# Altium PCB PCB_COF_1.2.PcbDoc
Units mm, origin at the board's own origin, x right, y up, seen from the top; angles counter-clockwise.
Board outline 70.1 x 92.58 mm, 2 copper layers (Top Layer, Bottom Layer), stack 0.325 mm thick; 59 components, 26 nets, 178 pads, 381 vias.
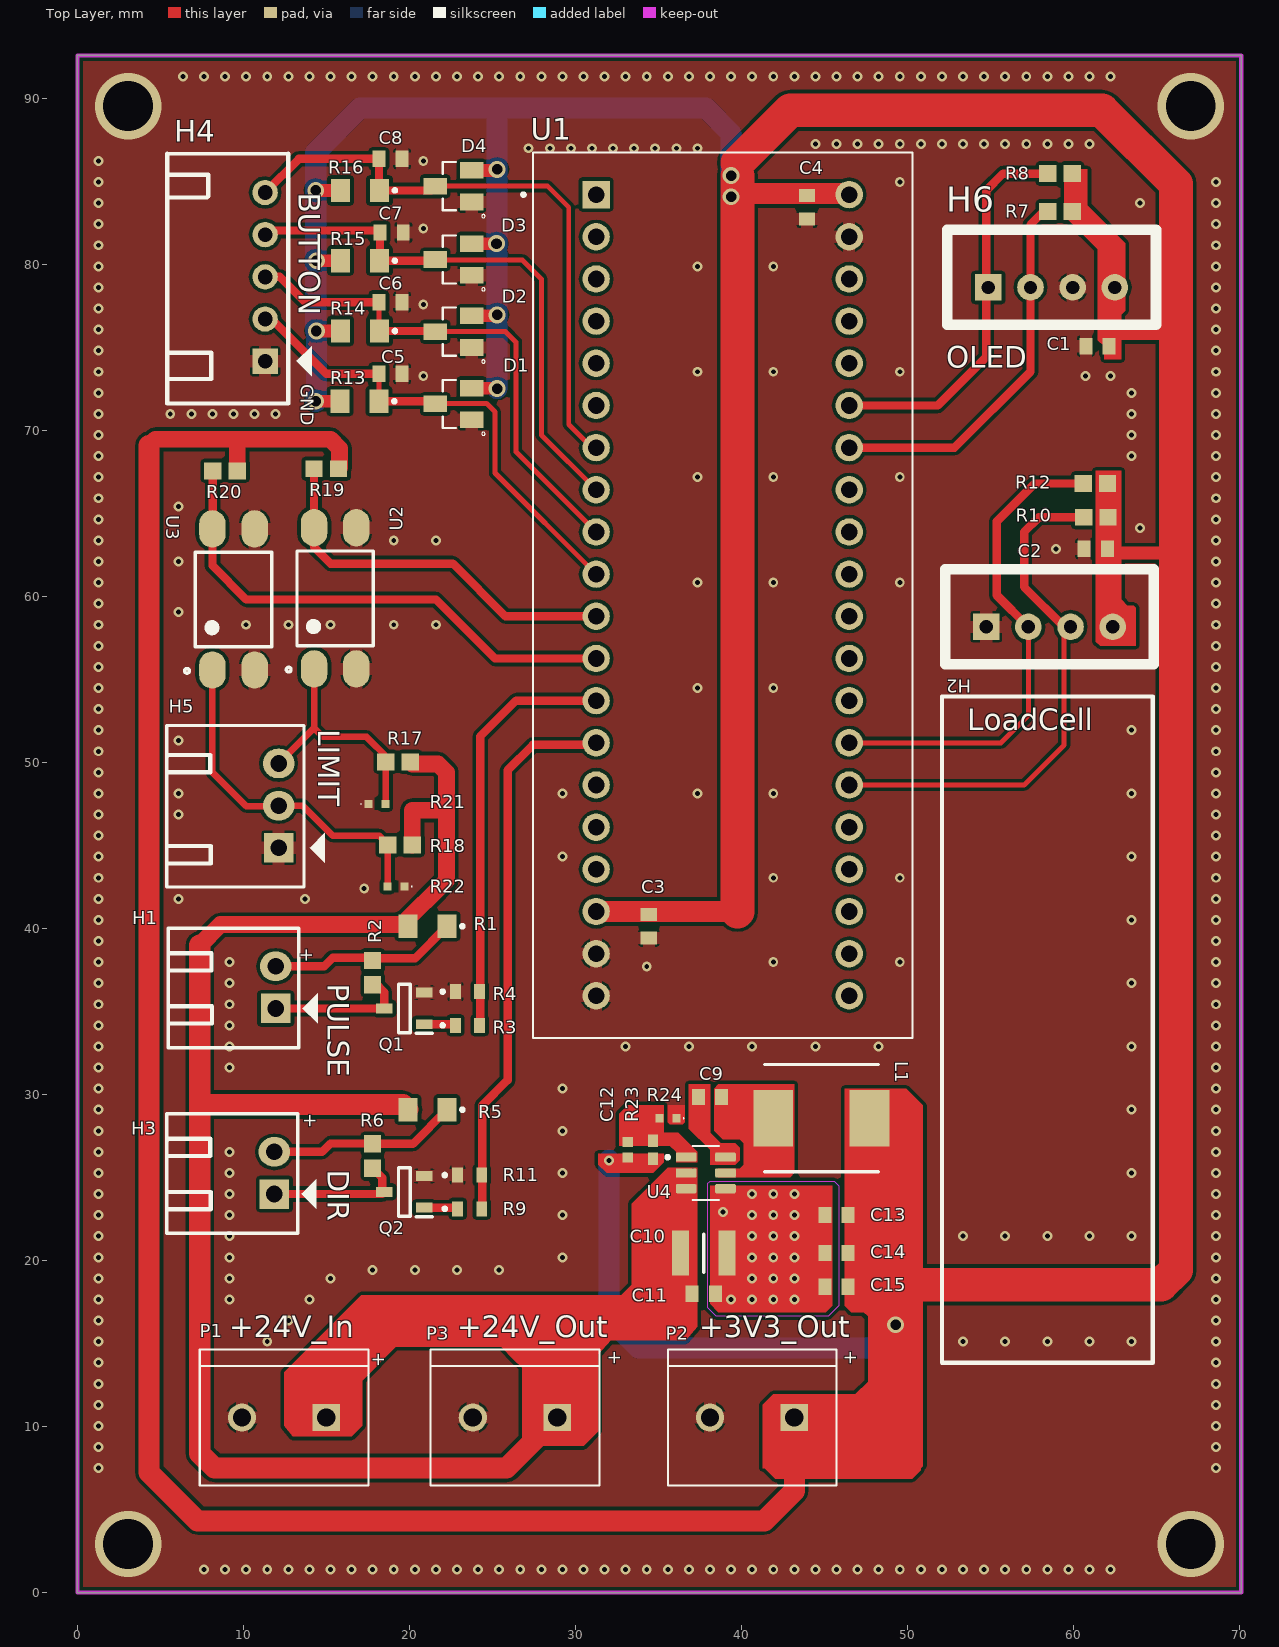
[diagram p0: Top Layer view]
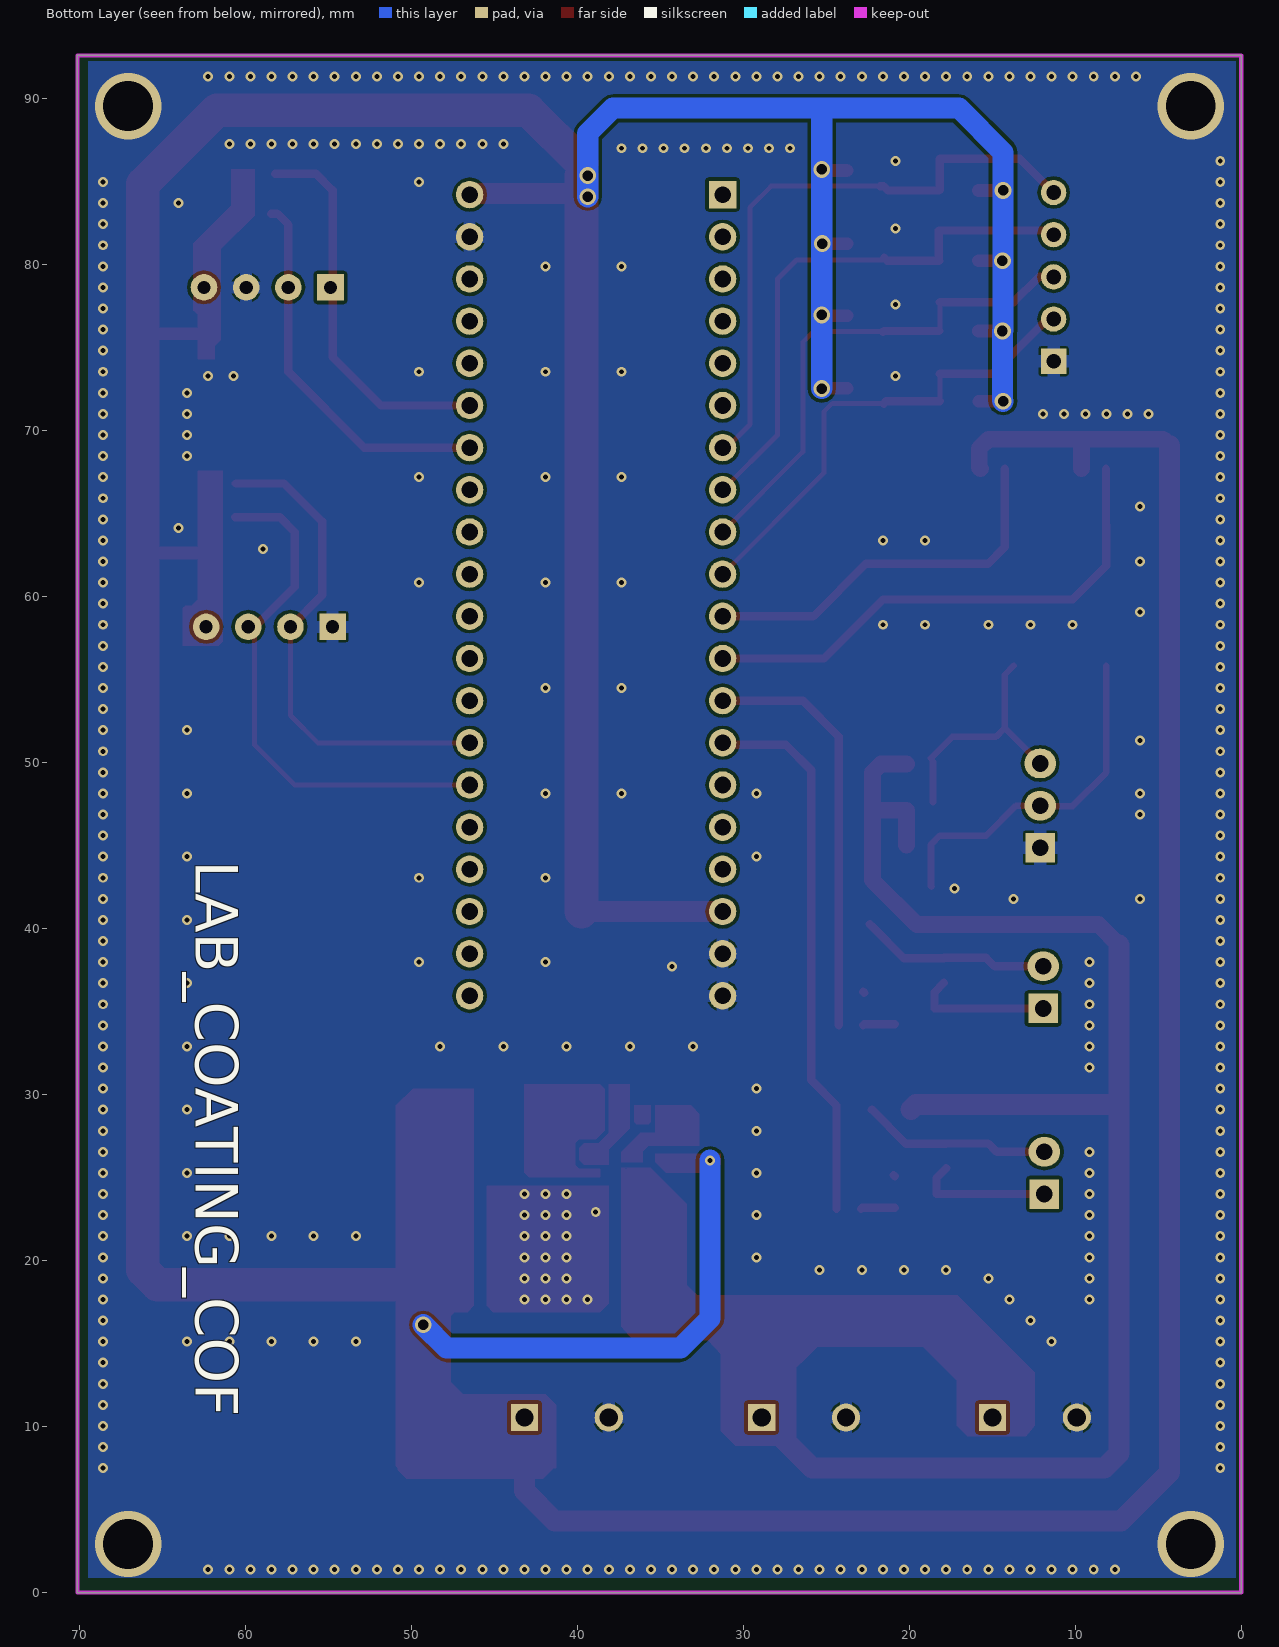
[diagram p1: Bottom Layer view, seen from below]
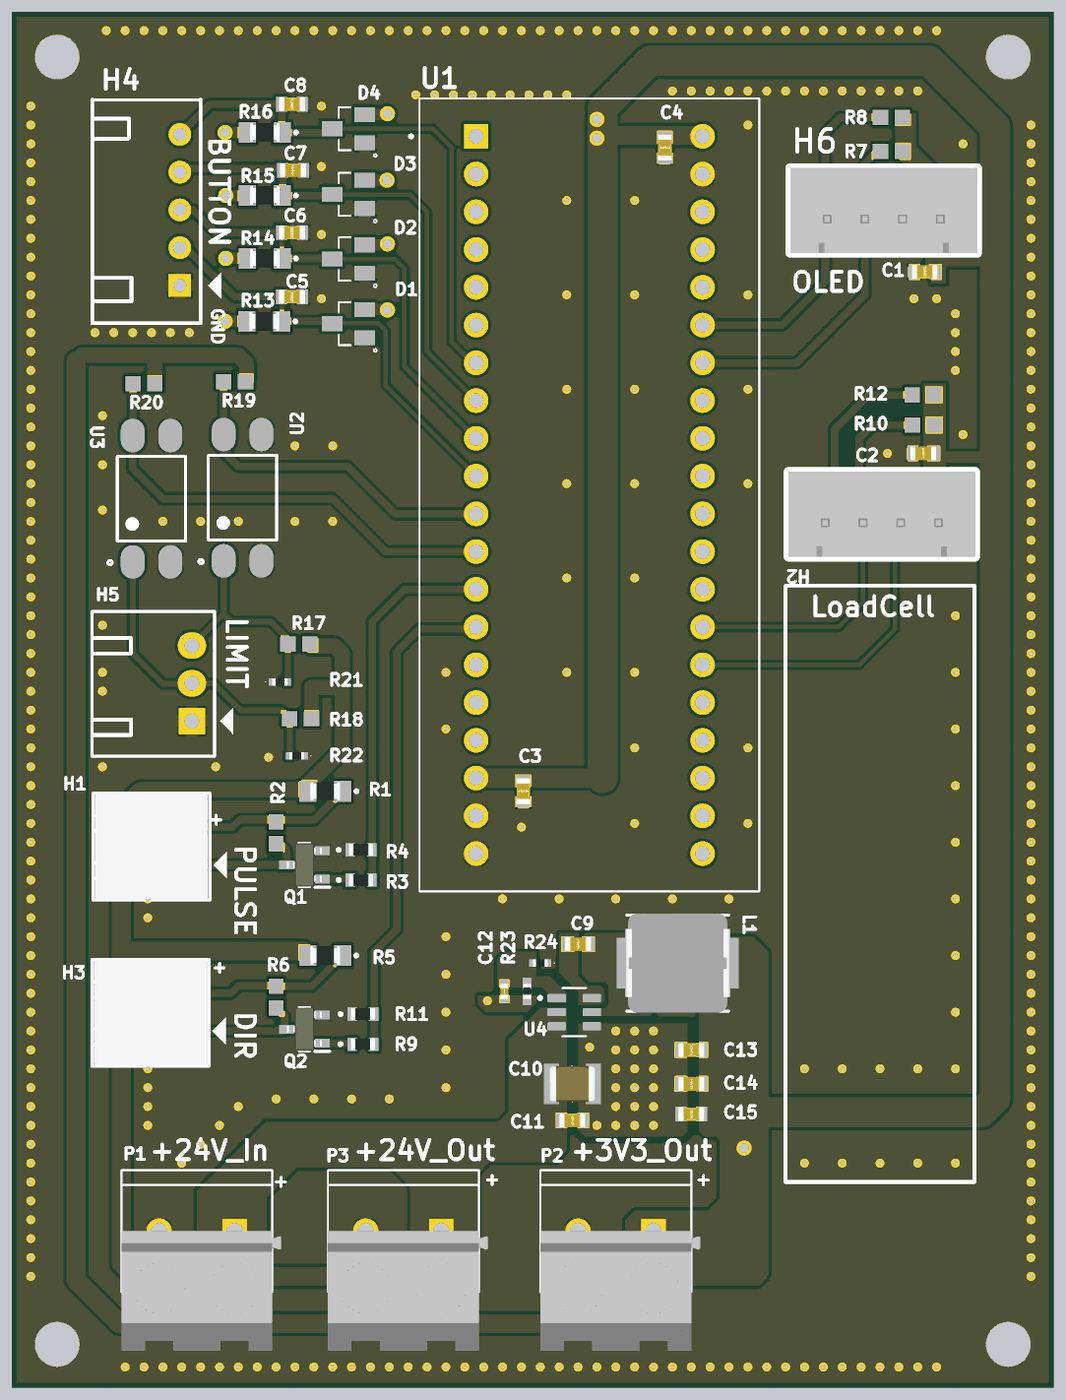
[diagram p2: 3D render of the assembled board from above, using the file's embedded part models]

## Layer stack, top to bottom
Top Solder: solder mask 0.0102, Solder Resist, Dk 3.5
Top Layer: signal copper 0.0356
Dielectric 1: core 0.254, FR-4, Dk 4.2
Bottom Layer: signal copper 0.0356
Bottom Solder: solder mask 0.0102, Solder Resist, Dk 3.5

## Board outline
0,0 70.104,0 70.104,92.583 0,92.583

## Design rules (kind name [scope] priority, off if disabled: settings)
Clearance "Clearance_Top overlayer" [OnLayer('Top Overlay') vs IsPad] p1: gap=0 ignorepadtopadclearanceinfootprint=TRUE
Clearance [All] p2: gap=0.2 ignorepadtopadclearanceinfootprint=TRUE except(0: Arc-Text Arc-Hole Track-Text Track-Hole SMDPad-Text SMDPad-Hole THPad-Text THPad-Hole Via-Text Via-Hole Fill-Text Fill-Hole Poly-Text Poly-Hole Region-Text Region-Hole Text-Text Text-Hole)
ComponentClearance ComponentClearance_Resc160 [HasFootprint('RESC1607X60N')] p1: gap=-5 collisioncheckmode=3 verticalgap=-5 showdistances=FALSE
ComponentClearance ComponentClearance_Res0603 [HasFootprint('RES 0603')] p2: gap=-5 collisioncheckmode=3 verticalgap=-5 showdistances=FALSE
ComponentClearance ComponentClearance_Diode [HasFootprint('SOT95P240X120-3N')] p3: gap=-5 collisioncheckmode=3 verticalgap=-5 showdistances=FALSE
ComponentClearance [All] p4: gap=0.2 collisioncheckmode=3 verticalgap=0.2 showdistances=FALSE
HoleSize [All] p1: absolutevalues=TRUE maxlimit=7 minlimit=0.15 maxpercent=80.000 minpercent=20.000
HoleToHoleClearance [All] p1: gap=0.2 allowstackedmicrovias=TRUE
MinimumSolderMaskSliver [All] p1: minsoldermaskwidth=0
PlaneConnect [All] p1: planeconnectstyle=Relief reliefexpansion=0.2 reliefentries=4 reliefconductorwidth=0.762 reliefairgap=0.2
PolygonConnect PolygonConnect_VIA [isVia] p1: connectstyle=Direct reliefconductorwidth=0.254 reliefentries=4 polygonreliefangle="90 Angle" airgapwidth=0.254
PolygonConnect "PolygonConnect_header 4p" [(InComponentClass('All Components') AND InNet('GND'))] p2: connectstyle=Relief reliefconductorwidth=0.762 reliefentries=4 polygonreliefangle="90 Angle" airgapwidth=0.127
PolygonConnect [All] p3: connectstyle=Relief reliefconductorwidth=0.254 reliefentries=4 polygonreliefangle="90 Angle" airgapwidth=0.127
RoutingVias [All] p1: holewidth=0.635 width=0.9 viastyle="Through Hole" minholewidth=0.3 minwidth=0.6 maxholewidth=5 maxwidth=7
SilkToSilkClearance [All] p1: silktosilkclearance=0
SilkToSolderMaskClearance [IsPad] p1: minsilkscreentomaskgap=0 clearancetoexposedcopper=TRUE
SolderMaskExpansion [isvia] p1: expansion=-0.1 soldermaskfromhole=TRUE
Width [All] p1: maxlimit=2.54 minlimit=0.254 preferedwidth=0.762
23 further rules are at their usual default settings.

## Classes and differential pairs
component class "Sche_Voltage regulator": C9 C10 C11 C12 C13 C14 C15 L1 P1 P2 P3 R23 R24 U4
component class Sche_PheriperalSchDoc: C5 C6 C7 C8 D1 D2 D3 D4 H4 H5 R13 R14 R15 R16 R17 R18 R19 R20 R21 R22 U2 U3
component class Sche_MCU_IO: C1 C2 C3 C4 H1 H2 H3 H6 Q1 Q2 R1 R2 R3 R4 R5 R6 R7 R8 R9 R10 R11 R12 U1

## Components (designator, comment, footprint, x,y, rotation, side; value= is the part's Value field where it differs from the comment)
C1 "22uF" "C 0603" 61.44,75.071 r180 top
C2 "22uF" "C 0603" 61.341,62.865 r180 top
C3 "22uF" "C 0603" 34.417,40.132 r90 top
C4 "22uF" "C 0603" 43.942,83.439 r90 top
C5 "0.1uF" CAPC1608X95N 18.858,73.406 r180 top
C6 "0.1uF" CAPC1608X95N 18.858,77.724 r180 top
C7 "0.1uF" CAPC1608X95N 18.923,81.915 r180 top
C8 "0.1uF" CAPC1608X95N 18.858,86.36 r180 top
C9 "0.1uF" "C 0603" 38.1,29.845 r0 top
C10 "10uF" CAPC3225X290N 37.719,20.447 r180 top
C11 "0.1uF" "C 0603" 37.719,17.993 r180 top
C12 "56pF" CAPC1005X55N 33.147,26.67 r270 top
C13 "22uF" "C 0603" 45.72,22.733 r0 top
C14 "22uF" "C 0603" 45.72,20.447 r0 top
C15 "0.1uF" CAPC1608X95N 45.72,18.415 r0 top
D1 "BAT54S" SOT95P240X120-3N 22.651,71.595 r90 top
D2 "BAT54S" SOT95P240X120-3N 22.651,75.946 r90 top
D3 "BAT54S" SOT95P240X120-3N 22.651,80.297 r90 top
D4 "BAT54S" SOT95P240X120-3N 22.651,84.709 r90 top
H1 "Pulse" "HEADER 2P DC 2.54" 11.938,35.181 r180 top
H2 "HEADER_UART_MODULE" XH2.54M-4 54.737,58.166 r0 top
H3 "Pulse" "HEADER 2P DC 2.54" 11.862,24.003 r180 top locked
H4 "Button_1-4" "HEADER 5P DC 2.54" 11.303,74.168 r180 top locked
H5 "Limit_SW_1-2" "HEADER 3P DC 2.54" 12.116,44.856 r180 top locked
H6 "HEADER_UART_MODULE" XH2.54M-4 54.864,78.613 r0 top
L1 "4.7uF" INDM6965X300N 44.81,28.575 r0 top
P1 "TERM BLK 2P SIDE ENT 5.08MM PCB - 282837-2" TE_282837-2 12.446,10.541 r180 top
P2 "282837-2" TE_282837-2 40.64,10.541 r180 top
P3 "282837-2" TE_282837-2 26.352,10.541 r180 top
Q1 "TRANS NPN 45V 0.8A SOT23-3 - BCW66GLT1G" SOT95P237X111-3N 19.685,35.179 r180 top
Q2 "TRANS NPN 45V 0.8A SOT23-3 - BCW66GLT1G" SOT95P237X111-3N 19.685,24.13 r180 top
R1 "2.2k" "RES 0805" 21.082,40.132 r180 top
R2 "100k" "RES 0603" 17.78,37.338 r90 top
R3 "1K" ERJ3EKF1000V 23.495,34.163 r0 top
R4 "10K" ERJ3EKF1000V 23.495,36.195 r0 top
R5 "2.2k" "RES 0805" 21.082,29.083 r180 top
R6 "100k" "Res 0603" 17.78,26.289 r90 top
R7 "4.7k" "Res 0603" 59.182,83.185 r0 top
R8 "4.7k" "Res 0603" 59.182,85.471 r0 top
R9 "1K" ERJ3EKF1000V 23.622,23.114 r0 top
R10 "4.7k" "Res 0603" 61.341,64.77 r0 top
R11 "10K" ERJ3EKF1000V 23.622,25.146 r0 top
R12 "4.7k" "Res 0603" 61.314,66.802 r0 top
R13 "2.2K" "RES 0805" 16.986,71.755 r180 top
R14 "2.2K" "RES 0805" 17.018,75.988 r180 top
R15 "2.2K" "RES 0805" 17.018,80.222 r180 top
R16 "2.2K" "RES 0805" 17.018,84.455 r180 top
R17 "9k1" "RES 0603" 19.304,50.038 r0 top
R18 "9k1" "RES 0603" 19.431,45.014 r0 top
R19 "4.7K" "Res 0603" 14.986,67.691 r0 top
R20 "4.7K" "Res 0603" 8.89,67.564 r0 top
R21 "100K" ERJ2RKD1004X 18.03,47.498 r0 top
R22 "100K" ERJ2RKD1004X 19.177,42.529 r180 top
R23 "93.1k" RESC1005X40N 34.671,26.67 r270 top
R24 "30.1k" ERJ2RKD1004X 35.56,28.575 r180 top
U1 "MODULE STM32F103C8T6 - ZC323000" MODULE_ZC323000 38.862,60.071 r0 top
U2 "OPTOISOLATOR 5KV TRANS 4SMD - PC817X2NIP0F" SOT254P975X400-4N 15.521,59.886 r90 top
U3 "OPTOISOLATOR 5KV TRANS 4SMD - PC817X2NIP0F" SOT254P975X400-4N 9.398,59.817 r90 top
U4 "IC REG BUCK ADJUSTABLE 2A TSOT26 - AP63300WU-7" SOT95P280X100-6N 37.846,25.273 r0 top

## Footprints (in the part's own frame and the unit in brackets; to place one, negate y for a bottom-side part, rotate by r counter-clockwise, add the part's x,y. Pads: shape width x height; smd on the part's side, far side on the other; paste and mask are expansions set on the pad)
"C 0603" [mm]
  rect 0.78x0.98 smd mask+0.051: 1(-0.7,0) 2(0.7,0)
  body extent -0.87,-0.48 0.88,0.47, height 0.87
CAPC1005X55N [mm]
  rect 0.6x0.62 smd mask+0.051: 1(-0.46,0) 2(0.46,0)
  body extent -0.52,-0.28 0.53,0.27, height 0.55
CAPC1608X95N [mm]
  rect 0.78x0.98 smd: 1(-0.7,0) 2(0.7,0)
  body extent -0.87,-0.48 0.88,0.47, height 0.87
CAPC3225X290N [mm]
  rect 1.02x2.72 smd: 1(-1.4,0) 2(1.4,0)
  silkscreen extent 0,-1.15 0,1.15, body extent -1.6,-1.25 1.6,1.25, height 2.9
ERJ2RKD1004X [mm]
  rect 0.475x0.5 smd: 1(-0.512,0) 2(0.512,0)
  silkscreen extent -0.97,-0.03 -0.93,0.03, body extent -0.5,-0.25 0.5,0.25, height 0.35
ERJ3EKF1000V [mm]
  rect 0.65x0.9 smd: 1(-0.725,0) 2(0.725,0)
  silkscreen extent -1.6,-0.1 -1.4,0.1, body extent -0.8,-0.4 0.8,0.4, height 0.45
"HEADER 2P DC 2.54" [mil]
  rect 70x70 hole 39.37: 1(0,0)
  oval 75x70 hole 39.37: 2(0,-100)
  silkscreen extent -100,-190 255,93, body extent -50,-190 250,90, height 237
"HEADER 3P DC 2.54" [mil]
  rect 70x70 hole 39.37 unplated: 1(0,0)
  oval 75x70 hole 39.37: 2(0,-100) 3(0,-200)
  silkscreen extent -110,-290 265,93
"HEADER 5P DC 2.54" [mil]
  rect 60x60 hole 35: 1(0,0)
  round 60 hole 35: 2(0,-100) 3(0,-200) 4(0,-300) 5(0,-400)
  silkscreen extent -110,-492 232,100
INDM6965X300N [mm]
  rect 2.4x3.4 smd: 1(-2.9,0) 2(2.9,0)
  silkscreen extent -3.43,-3.23 3.43,3.23, body extent -3.54,-3.33 3.53,3.34, height 2.89
MODULE_ZC323000 [mil]
  rect 65x65 hole 39.37: 1(-300,950)
  round 65 hole 39.37: 2(-300,850) 3(-300,750) 4(-300,650) 5(-300,550) 6(-300,450) 7(-300,350) 8(-300,250) 9(-300,150) 10(-300,50) 11(-300,-50) 12(-300,-150) 13(-300,-250) 14(-300,-350) 15(-300,-450) 16(-300,-550) 17(-300,-650) 18(-300,-750) 19(-300,-850) 20(-300,-950) 21(300,-950) 22(300,-850) 23(300,-750) 24(300,-650) 25(300,-550) 26(300,-450) 27(300,-350) 28(300,-250) 29(300,-150) 30(300,-50) 31(300,50) 32(300,150) 33(300,250) 34(300,350) 35(300,450) 36(300,550) 37(300,650) 38(300,750) 39(300,850) 40(300,950)
  silkscreen extent -476,-1050 450,1050
"RES 0603" [mm]
  rect 1.04x1.02 smd mask+0.076: 1(-0.735,0) 2(0.735,0)
"Res 0603" [mm]
  rect 1.04x1.02 smd mask+0.076: 1(-0.735,0) 2(0.735,0)
"RES 0805" [mm]
  rect 1.15x1.4 smd mask+0.076: 1(-1.175,0) 2(1.175,0)
  silkscreen extent -2.2,-0.1 -2,0.1, body extent -1,-0.62 1,0.63, height 0.6
RESC1005X40N [mm]
  rect 0.75x0.6 smd: 1(-0.55,0) 2(0.55,0)
  body extent -0.5,-0.25 0.5,0.25, height 0.4
SOT95P237X111-3N [mm]
  rect 1x0.6 smd: 1(-1.2,0.95) 2(-1.2,-0.95) 3(1.2,0)
  silkscreen extent -1.7,-1.46 0.35,1.5, body extent -1.18,-1.46 1.19,1.46, height 1.11
SOT95P240X120-3N [mm]
  rect 1x1.4 smd: 1(-0.95,-1.1) 2(0.95,-1.1) 3(0,1.1)
  silkscreen extent -1.9,-1.9 1.45,0.65
SOT95P280X100-6N [mm]
  rrect25% 1.24x0.55 smd: 1(-1.185,0.95) 2(-1.185,0) 3(-1.185,-0.95) 4(1.185,-0.95) 5(1.185,0) 6(1.185,0.95)
  silkscreen extent -2.4,-1.62 0.8,1.62
SOT254P975X400-4N [mm]
  oval 2.25x1.6 smd: 1(-4.25,1.27) 2(-4.25,-1.27) 3(4.25,-1.27) 4(4.25,1.27)
  silkscreen extent -4.44,-2.3 2.85,2.94
TE_282837-2 [mm]
  rect 1.65x1.65 / inner round 1.65 / far side rect 1.65x1.65 hole 1.1: 1(-2.54,0)
  round 1.7 hole 1.1: 2(2.54,0)
  silkscreen extent -5.08,-4.1 5.08,4.1, body extent -5.68,0 5.08,8.2, height 7.25
XH2.54M-4 [mm]
  rect 1.6x1.6 hole 0.8: 1(0,0)
  round 1.6 hole 0.8: 2(2.54,0) 3(5.08,0) 4(7.62,0)
  silkscreen extent -2.48,-2.26 10.1,3.46, body extent -2.48,-2.26 10.1,3.48, height 6.91

## Part data
C1 C2 C3 C4 C13 C14: library part "CAP CER 22UF 6.3V X5R 0603 - GRM188R60J226MEA0D", "CAP CER 22UF 6.3V X5R 0603", =6.3V, Catalog=GRM188R60J226MEA0D
C5 C6 C7 C8 C15: library part "CAP CER 0.1UF 10V X7R 0603 - C0603C104K8RACTU", "Multilayer Ceramic Capacitors MLCC - SMD/SMT", Manufacturer_Name=KEMET, Manufacturer_Part_Number=C0603C104K8RACTU/1K, Mouser Part Number=N/A, =10V, Datasheet Link=https://api.kemet.com/component-edge/download/specsheet/C0603C104K8RACTU.pdf, Geometry.Height=0.95mm, Mouser Price/Stock=https://www.mouser.com/Search/Refine.aspx?Keyword=N%2FA
C9 C11: library part "CAP CER 0.1UF 50V X7R 0603 - ESD35C104K4T2A-24", "CAP CER 0.1UF 50V X7R 0603", =50V, Catalog=ESD35C104K4T2A-24
C10: library part "CAP CER 10UF 50V Y5V 1210 - 12105G106ZAT2A", "CAP CER 10UF 50V Y5V 1210", Manufacturer_Name=AVX, Manufacturer_Part_Number=12105G106ZAT2A/500, =50V, Datasheet Link=http://datasheets.avx.com/Y5V.pdf, Geometry.Height=2.9mm
C12: library part "CAP CER 56PF 50V C0G/NPO 0402 - CC0402JRNPO9BN560", "CAP CER 56PF 50V C0G/NPO 0402", Arrow Part Number=CC0402JRNPO9BN560, Manufacturer_Name=KEMET, =50V, Arrow Price/Stock=https://www.arrow.com/en/products/cc0402jrnpo9bn560/yageo, Datasheet Link=https://www.yageo.com/upload/media/product/productsearch/datasheet/mlcc/UPY-GP_NP0_16V-to-50V_18.pdf, Geometry.Height=0.55mm, Manufacturer_Part_Number=CC0402JRNPO9BN560
D1 D2 D3 D4: library part "DIODE SCHOTTKY 30V 150MA SOT23  - BAT54S", "DIODE SCHOTTKY 30V 150MA SOT23", Package=None, Availability=Unavailable, MP=BAT54S, Price=None
H1 H3: library part "Header 2P 2.54 Duc Cong", "C?m", Chung_Loai=C?m, Don_Vi=Con, Ma_Hang=MH002852, Ten_Linh_Kien="Header 2P XH2.54-2P Ð?c Cong"
H2 H6: library part "Header 4P 2.54 Duc Thang", "C?m", Chung_Loai=C?m, Don_Vi=Con, Ma_Hang=MH001285, Ten_Linh_Kien="Header 4P XH2.54-4P Ð?c Th?ng"
H4: library part "Header 5P 2.54 Duc Cong", "C?m", Chung_Loai=C?m, Don_Vi=Con, Ma_Hang=MH001308, Ten_Linh_Kien="Header 5P XH2.54-5P Ð?c Cong"
H5: library part "Header 3P 2.54 Duc Cong", "C?m", Chung_Loai=C?m, Don_Vi=Con, Ma_Hang=MH001302, Ten_Linh_Kien="Header 3P XH2.54-3P Ð?c Cong"
L1: library part "IND 4.7UH 5.5A 40 MOHM SMD - IHLP2525CZER4R7M01", "FIXED IND 4.7UH 5.5A 40 MOHM SMD", Arrow Part Number=IHLP2525CZER4R7M01, Manufacturer_Name=Vishay, Mouser Part Number=70-IHLP2525CZER4R7M1, =5.5A, Arrow Price/Stock=https://www.arrow.com/en/products/ihlp2525czer4r7m01/vishay?region=europe, Datasheet Link=https://componentsearchengine.com/Datasheets/2/IHLP2525CZER4R7M01.pdf, Geometry.Height=3mm, Manufacturer_Part_Number=IHLP2525CZER4R7M01, Mouser Price/Stock=https://www.mouser.co.uk/ProductDetail/Vishay-Dale/IHLP2525CZER4R7M01?qs=delkvkPykKkoRC4%2FTC3qyQ%3D%3D
P1: "TERM BLK 2P SIDE ENT 5.08MM PCB", Package=None, Availability="In Stock", Check_prices=https://www.snapeda.com/parts/282837-2/TE+Connectivity+AMP+Connectors/view-part/?ref=eda, Comment_1=TER_+3.3V_Output, MF="TE Connectivity", MP=282837-2, Price=None, Purchase-URL=https://pricing.snapeda.com/search/part/282837-2/?ref=eda, SnapEDA_Link=https://www.snapeda.com/parts/282837-2/TE+Connectivity+AMP+Connectors/view-part/?ref=snap
P2 P3: "Connector Terminal Blocks Receptacle 2 Position 5.08mm Solder Straight Thru-Hole 13.5A/Contact", Package=None, Availability="In Stock", Check_prices=https://www.snapeda.com/parts/282837-2/TE+Connectivity+AMP+Connectors/view-part/?ref=eda, MF="TE Connectivity", MP=282837-2, Price=None, Purchase-URL=https://pricing.snapeda.com/search/part/282837-2/?ref=eda, SnapEDA_Link=https://www.snapeda.com/parts/282837-2/TE+Connectivity+AMP+Connectors/view-part/?ref=snap
  P2: Comment_1=TER_+3.3V_Output
  P3: Comment_1=+24V
Q1 Q2: "TRANS NPN 45V 0.8A SOT23-3", Arrow Part Number=BCW66GLT1G, Manufacturer_Name=onsemi, Mouser Part Number=863-BCW66GLT1G, Arrow Price/Stock=https://www.arrow.com/en/products/bcw66glt1g/on-semiconductor?region=nac, Datasheet Link=http://www.onsemi.com/pub/Collateral/BCW66GLT1-D.PDF, Geometry.Height=1.11mm, Manufacturer_Part_Number=BCW66GLT1G, Mouser Price/Stock=https://www.mouser.co.uk/ProductDetail/onsemi/BCW66GLT1G?qs=R2UZ7gjkEjKs0bN2RlXbWw%3D%3D
R1 R5 R13 R14 R15 R16: library part "RES SMD 2.2K OHM 5% 1/2W 0805 - ERJ-P06J222V", "RES SMD 2.2K OHM 5% 1/2W 0805", MF=PANASONIC, MP=ERJ-P06J222V
R2 R6: library part "RES SMD 100K OHM 1% 1/10W 0603 - CRCW0603100KFKEA", "RES SMD 100K OHM 1% 1/10W 0603", MF=Yageo, MP=CRCW0603100KFKEA
R3 R9: library part "RES SMD 1K OHM 5% 1/10W 0603 - ERJ-3GEYJ102V", "RES SMD 1K OHM 5% 1/10W 0603", Arrow Part Number=ERJ-3GEYJ102V, Manufacturer_Name=Panasonic, Mouser Part Number=667-ERJ-3GEYJ102V, Arrow Price/Stock=https://www.arrow.com/en/products/erj-3geyj102v/panasonic?region=nac, Datasheet Link=http://docs-europe.electrocomponents.com/webdocs/13ba/0900766b813ba21b.pdf, Geometry.Height=0.55mm, Manufacturer_Part_Number=ERJ-3GEYJ102V, Mouser Price/Stock=https://www.mouser.co.uk/ProductDetail/Panasonic/ERJ-3GEYJ102V?qs=66DK8nO8gJBFiTsClorqsA%3D%3D
R4 R11: library part "RES SMD 10K OHM 5% 1/10W 0603 - ERJ3GEYJ103V", "RES SMD 10K OHM 5% 1/10W 0603", Manufacturer_Name=Panasonic, Manufacturer_Part_Number=ERJ3GEYJ103V, Mouser Part Number=667-ERJ-3GEYJ103V, Datasheet Link=http://docs-europe.electrocomponents.com/webdocs/13ba/0900766b813ba21b.pdf, Geometry.Height=0.55mm, Mouser Price/Stock=http://www.mouser.com/Search/ProductDetail.aspx?qs=66DK8nO8gJBWgc%252b0VNNxzg%3d%3d
R7 R8 R10 R12 R19 R20: library part "RES 4.7K OHM 1% 1/10W 0603 - RC0603FR-074K7L", "RES 4.7K OHM 1% 1/10W 0603", Package="0603 Yageo", Availability=Unavailable, MF=Yageo, MP=RC0603FR-074K7L, Price=None, SnapEDA_Link=https://www.snapeda.com/parts/RC0603FR-074K7L/Yageo/view-part/473520/?ref=snap
R17 R18: library part "RES SMD 9.1K OHM 1% 1/10W 0603 - ERJ-3EKF9101V", "RES SMD 9.1K OHM 1% 1/10W 0603", MF=Panasonic, MP=ERJ-3EKF9101V
R21 R22: library part "RES SMD 100K OHM 1% 1/10W 0402 - ERJ2RKF1003X", "RES SMD 100K OHM 1% 1/10W 0402", Manufacturer_Name=Panasonic, Manufacturer_Part_Number=ERJ2RKF1003X, =0.1W, Datasheet Link=http://docs-europe.electrocomponents.com/webdocs/13ba/0900766b813ba21b.pdf, Geometry.Height=0.4mm
R23: library part "RES 93.1K OHM 1% 1/16W 0402 - RC0402FR-0793K1L", "RES 93.1K OHM 1% 1/16W 0402", Manufacturer_Name=KEMET, Manufacturer_Part_Number=RC0402FR-0793K1L, Mouser Part Number=603-RC0402FR-0793K1L, Datasheet Link=http://www.yageo.com/documents/recent/PYu-RC0402_51_RoHS_L_6_r.pdf, Geometry.Height=0.4mm
R24: library part "RES SMD 30.1K OHM 1% 1/10W 0402 - ERJ-2RKF3012X", "RES SMD 30.1K OHM 1% 1/10W 0402", Manufacturer_Name=Panasonic, Manufacturer_Part_Number=ERJ-2RKF3012X, Mouser Part Number=667-ERJ-2RKF3012X, Datasheet Link=https://industrial.panasonic.com/cdbs/www-data/pdf/RDA0000/AOA0000C86.pdf, Geometry.Height=0.4mm, Mouser Price/Stock=https://www.mouser.co.uk/ProductDetail/Panasonic/ERJ-2RKF3012X?qs=YMBIwoNQYdWdJYigM0pxkw%3D%3D
U1: "MODULE STM32F103C8T6", Package=None, Availability=Unavailable, MP=ZC323000, Price=None
U2 U3: "Optoisolator Transistor Output 5000Vrms 1 Channel 4-SMD", Package="SMD-4 Sharp", Check_prices=https://www.snapeda.com/parts/PC817X2NIP0F/Sharp+Microelectronics/view-part/?ref=eda, Digi-Key_Part_Number=425-2192-2-ND, MF="Sharp Microelectronics", MP=PC817X2NIP0F, Purchase-URL=https://pricing.snapeda.com/search/part/PC817X2NIP0F/?ref=eda, SnapEDA_Link=https://www.snapeda.com/parts/PC817X2NIP0F/Sharp+Microelectronics/view-part/?ref=snap
U4: "IC REG BUCK ADJUSTABLE 2A TSOT26", Package="SOT-23-6 Diodes Incorporated", Availability=Unavailable, DigiKey-Purchase-URL=https://snapeda.com/shop?store=DigiKey&id=4221814, MF="Diodes Incorporated", MP=AP63300WU-7, Price=None, SnapEDA_Link=https://www.snapeda.com/parts/AP63300WU-7/Diodes%20Inc./view-part/4221814/?ref=snap

## Via types
v1: diameter 0.6, hole 0.3, Top Layer to Bottom Layer, 366 vias
v2: diameter 1.016, hole 0.635, Top Layer to Bottom Layer, 11 vias
v3: diameter 4, hole 3, Top Layer to Bottom Layer, 4 vias

## Nets (pads, with @x,y where several pads share a name; then routed paths per layer and width w, separated by ;. In a path a pad name is that pad's centre, name@x,y a point inside that pad or via, vN(x,y) a via of type N, cw(c..) or ccw(c..) an arc to the next point about the centre after c; other vN are vias at no path point)
+3.3V: C1.1 C2.1 C3.2 C4.2 C12.2 C13.2 C14.2 C15.2 D1.2 D2.2 D3.2 D4.2 H2.4 H6.4 L1.2 P2.1 R7.2 R8.2 R10.2 R12.2 R13.2 R14.2 R15.2 R16.2 R19.2 R20.2 R23.2 U1.18 U1.40 | length 403
  Top Layer w0.762: v2(14.351,71.755) R13.2 ; v2(14.351,84.455) R16.2 ; v2(14.393,75.988) R14.2 ; v2(14.393,80.222) R15.2 ; D1.2 25.245,72.545 v2(25.273,72.517) ; D2.2 25.207,76.896 v2(25.273,76.962) ; D3.2 v2(25.24,81.247) ; D4.2 25.207,85.659 v2(25.273,85.725) ; U1.40@46.414,84.269 U1.40 ; C2.1@62.258,62.738 62.385,62.611 66.167,62.611 ; 62.298,75.692 62.425,75.819 66.167,75.819
  Top Layer w1.016: 4.318,69.088 4.699,69.469 9.525,69.469 ; R20.2@9.625,67.691 9.625,69.369 9.525,69.469 ; R19.2 15.789,67.759 15.789,68.92 15.24,69.469 9.525,69.469
  Top Layer w1.27: 4.318,69.088 4.318,7.239 7.239,4.318 41.367,4.318 43.18,6.131 P2.1 ; U1.18 39.751,41.021 ; v2@39.751,84.269 U1.40@46.414,84.269
  Top Layer w2.032: 39.751,41.021 v2@39.751,84.074 ; v2@39.751,84.269 v2@39.751,85.344 ; 39.751,86.106 42.926,89.281 61.722,89.281 66.167,84.836 66.167,75.819 66.167,62.611 66.167,19.431 65.278,18.542 49.784,18.542
  Bottom Layer w1.27: v2(14.351,71.755) 14.393,71.797 v2(14.393,75.988) 14.351,76.031 v2(14.351,84.455) 14.351,86.741 17.018,89.408 37.846,89.408 39.37,87.884 v2(39.37,85.344) v2(39.37,84.074) ; v2(25.273,72.517) v2(25.273,76.962) v2(25.273,85.725) 25.273,88.773 ; v1(32.004,26.035) 32.004,16.51 33.782,14.732 47.879,14.732 v2(49.276,16.129)
+24V: C10.2 C11.2 P1.1 P3.1 R1.2 R5.2 R17.2 R18.2 U4.2 U4.3 | length 95.8
  Top Layer w1.016: 7.366,38.989 8.604,40.227 19.551,40.227 22.225,42.901 22.225,47.117 ; R18.2 20.166,47.117 22.225,47.117 ; R17.2@20.166,49.911 21.717,49.911 22.225,49.403 22.225,47.117
  Top Layer w1.27: 7.366,38.989 7.366,29.388 ; R5.2 19.602,29.388 7.366,29.388 ; P3.1 25.845,7.493 8.255,7.493 7.366,8.382 7.366,29.388
"- Dir": R9.2 R11.2 U1.14 | length 33.1
  Top Layer w0.508: R9.2@24.384,23.114 24.384,29.337 25.908,30.861 25.908,49.53 27.432,51.054 31.115,51.054 U1.14
"- Pulse": R3.2 R4.2 U1.13 | length 25.3
  Top Layer w0.508: R3.2@24.257,34.163 24.257,51.562 26.416,53.721 U1.13
Button_1: C8.2 D4.3 H4.5 R16.1 U1.7 | length 37
  Top Layer w0.3: D4.3@21.76,84.709 28.321,84.709 29.591,83.439 29.591,70.358 30.988,68.961 U1.7
  Top Layer w0.5: H4.5 13.335,86.36 C8.2 18.158,84.49 R16.1 21.297,84.455 D4.3 D4.3@21.76,84.709
Button_2: C7.2 D3.3 H4.4 R15.1 U1.8 | length 33.2
  Top Layer w0.3: D3.3@21.506,80.264 26.797,80.264 27.94,79.121 27.94,69.723 U1.8
  Top Layer w0.5: H4.4 11.557,82.042 18.223,82.042 C7.2 18.223,80.252 R15.1 21.337,80.222 D3.3@21.506,80.391
Button_3: C6.2 D2.3 H4.3 R14.1 U1.9 | length 31.2
  Top Layer w0.3: C6.2 18.158,76.023 R14.1 ; D2.3@21.59,75.946 25.781,75.946 26.416,75.311 26.416,68.707 U1.9
  Top Layer w0.5: H4.3 12.192,79.248 13.716,77.724 C6.2
  Top Layer w0.508: R14.1 21.548,75.988 D2.3@21.59,75.946
Button_4: C5.2 D1.3 H4.2 R13.1 U1.10 | length 29.4
  Top Layer w0.3: C5.2 18.158,71.758 R13.1 ; D1.3@21.59,71.628 24.638,71.628 25.146,71.12 25.146,67.437 U1.10
  Top Layer w0.5: H4.2 11.684,76.708 14.986,73.406 C5.2
  Top Layer w0.508: R13.1 21.391,71.755 D1.3
GND: C1.2 C2.2 C3.1 C4.1 C5.1 C6.1 C7.1 C8.1 C10.1 C11.1 C13.1 C14.1 C15.1 D1.1 D2.1 D3.1 D4.1 H2.1 H4.1 H5.1 H6.3 P1.2 P2.2 P3.2 Q1.2 Q2.2 R4.1 R11.1 R21.1 R22.1 R24.1 U1.19 U1.20 U1.39 U2.2 U2.3 U3.2 U3.3 U4.4 | length 0.2
  Top Layer w0.508: Q2.2 Q2.2@20.951,25.146 ; R4.1@22.704,36.129 R4.1
  other v1: 7.62,1.397 8.89,1.397 10.16,1.397 11.43,1.397 12.7,1.397 13.97,1.397 15.24,1.397 16.51,1.397 17.78,1.397 19.05,1.397 20.32,1.397 21.59,1.397 22.86,1.397 24.13,1.397 25.4,1.397 26.67,1.397 27.94,1.397 29.21,1.397 30.48,1.397 31.75,1.397 33.02,1.397 34.29,1.397 35.56,1.397 36.83,1.397 38.1,1.397 39.37,1.397 40.64,1.397 41.91,1.397 43.18,1.397 44.45,1.397 45.72,1.397 46.99,1.397 48.26,1.397 49.53,1.397 50.8,1.397 52.07,1.397 53.34,1.397 54.61,1.397 55.88,1.397 57.15,1.397 58.42,1.397 59.69,1.397 60.96,1.397 62.23,1.397 1.27,7.493 68.58,7.493 1.27,8.763 68.58,8.763 1.27,10.033 68.58,10.033 1.27,11.303 68.58,11.303 1.27,12.573 68.58,12.573 1.27,13.843 68.58,13.843 1.27,15.113 11.43,15.113 53.34,15.113 55.88,15.113 58.42,15.113 60.96,15.113 63.5,15.113 68.58,15.113 1.27,16.383 12.7,16.383 68.58,16.383 1.27,17.653 9.144,17.653 13.97,17.653 39.37,17.653 40.64,17.653 41.91,17.653 43.18,17.653 68.58,17.653 1.27,18.923 9.144,18.923 15.24,18.923 40.64,18.923 41.91,18.923 43.18,18.923 68.58,18.923 17.78,19.431 20.32,19.431 22.86,19.431 25.4,19.431 1.27,20.193 9.144,20.193 29.21,20.193 40.64,20.193 41.91,20.193 43.18,20.193 68.58,20.193 1.27,21.463 9.144,21.463 40.64,21.463 41.91,21.463 43.18,21.463 53.34,21.463 55.88,21.463 58.42,21.463 60.96,21.463 63.5,21.463 68.58,21.463 1.27,22.733 9.144,22.733 29.21,22.733 40.64,22.733 41.91,22.733 43.18,22.733 68.58,22.733 38.887,22.911 1.27,24.003 9.144,24.003 40.64,24.003 41.91,24.003 43.18,24.003 68.58,24.003 1.27,25.273 9.144,25.273 29.21,25.273 63.5,25.273 68.58,25.273 1.27,26.543 9.144,26.543 68.58,26.543 1.27,27.813 29.21,27.813 68.58,27.813 1.27,29.083 63.5,29.083 68.58,29.083 1.27,30.353 29.21,30.353 68.58,30.353 1.27,31.623 9.144,31.623 68.58,31.623 1.27,32.893 9.144,32.893 33.02,32.893 36.83,32.893 40.64,32.893 44.45,32.893 48.26,32.893 63.5,32.893 68.58,32.893 1.27,34.163 9.144,34.163 68.58,34.163 1.27,35.433 9.144,35.433 68.58,35.433 1.27,36.703 9.144,36.703 63.5,36.703 68.58,36.703 34.29,37.719 1.27,37.973 9.144,37.973 41.91,37.973 49.53,37.973 68.58,37.973 1.27,39.243 68.58,39.243 1.27,40.513 63.5,40.513 68.58,40.513 1.27,41.783 6.096,41.783 13.716,41.783 68.58,41.783 17.272,42.418 1.27,43.053 41.91,43.053 49.53,43.053 68.58,43.053 1.27,44.323 29.21,44.323 63.5,44.323 68.58,44.323 1.27,45.593 68.58,45.593 1.27,46.863 6.096,46.863 68.58,46.863 1.27,48.133 6.096,48.133 29.21,48.133 37.338,48.133 41.91,48.133 63.5,48.133 68.58,48.133 1.27,49.403 68.58,49.403 1.27,50.673 68.58,50.673 6.096,51.308 1.27,51.943 63.5,51.943 68.58,51.943 1.27,53.213 68.58,53.213 1.27,54.483 37.338,54.483 41.91,54.483 68.58,54.483 1.27,55.753 68.58,55.753 1.27,57.023 68.58,57.023 1.27,58.293 10.16,58.293 12.7,58.293 15.24,58.293 19.05,58.293 21.59,58.293 68.58,58.293 6.096,59.055 1.27,59.563 68.58,59.563 1.27,60.833 37.338,60.833 41.91,60.833 49.53,60.833 68.58,60.833 1.27,62.103 6.096,62.103 68.58,62.103 58.928,62.865 1.27,63.373 19.05,63.373 21.59,63.373 68.58,63.373 64.008,64.135 1.27,64.643 68.58,64.643 6.096,65.405 1.27,65.913 68.58,65.913 1.27,67.183 37.338,67.183 41.91,67.183 49.53,67.183 68.58,67.183 1.27,68.453 63.5,68.453 68.58,68.453 1.27,69.723 63.5,69.723 68.58,69.723 1.27,70.993 5.588,70.993 6.858,70.993 8.128,70.993 9.398,70.993 10.668,70.993 11.938,70.993 63.5,70.993 68.58,70.993 1.27,72.263 63.5,72.263 68.58,72.263 20.828,73.279 60.706,73.279 62.23,73.279 1.27,73.533 37.338,73.533 41.91,73.533 49.53,73.533 68.58,73.533 1.27,74.803 68.58,74.803 1.27,76.073 68.58,76.073 1.27,77.343 68.58,77.343 20.828,77.597 1.27,78.613 68.58,78.613 1.27,79.883 37.338,79.883 41.91,79.883 68.58,79.883 1.27,81.153 68.58,81.153 20.828,82.169 1.27,82.423 68.58,82.423 1.27,83.693 64.008,83.693 68.58,83.693 1.27,84.963 49.53,84.963 68.58,84.963 1.27,86.233 20.828,86.233 27.178,86.995 28.448,86.995 29.718,86.995 30.988,86.995 32.258,86.995 33.528,86.995 34.798,86.995 36.068,86.995 37.338,86.995 44.45,87.249 45.72,87.249 46.99,87.249 48.26,87.249 49.53,87.249 50.8,87.249 52.07,87.249 53.34,87.249 54.61,87.249 55.88,87.249 57.15,87.249 58.42,87.249 59.69,87.249 60.96,87.249 6.35,91.313 7.62,91.313 8.89,91.313 10.16,91.313 11.43,91.313 12.7,91.313 13.97,91.313 15.24,91.313 16.51,91.313 17.78,91.313 19.05,91.313 20.32,91.313 21.59,91.313 22.86,91.313 24.13,91.313 25.4,91.313 26.67,91.313 27.94,91.313 29.21,91.313 30.48,91.313 31.75,91.313 33.02,91.313 34.29,91.313 35.56,91.313 36.83,91.313 38.1,91.313 39.37,91.313 40.64,91.313 41.91,91.313 43.18,91.313 44.45,91.313 45.72,91.313 46.99,91.313 48.26,91.313 49.53,91.313 50.8,91.313 52.07,91.313 53.34,91.313 54.61,91.313 55.88,91.313 57.15,91.313 58.42,91.313 59.69,91.313 60.96,91.313 62.23,91.313
  other v3: 3.048,2.921 67.056,2.921 3.048,89.535 67.056,89.535
Limit_SW_1: R19.1 U1.11 U2.4 | length 23.4
  Top Layer w0.5: R19.1 U2.4 14.25,64.135 14.25,62.966 15.24,61.976 22.606,61.976 25.781,58.801 U1.11
Limit_SW_2: R20.1 U1.12 U3.4 | length 31.3
  Top Layer w0.5: R20.1@8.155,67.691 R20.1 8.155,64.348 8.128,64.321 U3.4 8.128,61.849 10.16,59.817 21.59,59.817 25.146,56.261 U1.12
NetC9_1: C9.1 U4.6
NetC9_2: C9.2 L1.1 U4.5
NetC12_1: C12.1 R23.1 R24.2 U4.1
NetH1_1: H1.1 Q1.3 R2.1 | length 8.3
  Top Layer w0.5: H1.1@11.989,35.179 Q1.3 18.485,36.152 R2.1@17.907,36.73
NetH1_2: H1.2 R1.1 R2.2 | length 11.5
  Top Layer w0.5: H1.2@11.989,37.719 14.859,37.719 15.367,38.227 17.88,38.227 17.907,38.2 20.325,38.2 R1.1 R1.1@22.384,40.259
NetH3_1: H3.1 Q2.3 R6.1 | length 8.3
  Top Layer w0.5: H3.1 18.358,24.003 18.358,24.976 R6.1
NetH3_2: H3.2 R5.1 R6.2 | length 11.5
  Top Layer w0.5: H3.2 14.732,26.543 15.24,27.051 17.753,27.051 R6.2 20.198,27.024 R5.1
NetH5_2: H5.2 R18.1 R22.2 U3.1 | length 21.3
  Top Layer w0.4: U3.1@8.128,55.821 U3.1 8.128,49.403 10.16,47.371 12.09,47.371 H5.2 13.564,47.396 15.367,45.593 18.161,45.593 R18.1@18.669,45.085 ; R22.2 18.696,42.56 R18.1
NetH5_3: H5.3 R17.1 R21.2 U2.1 | length 14.6
  Top Layer w0.4: H5.3 14.251,52.072 ; U2.1@13.716,55.821 14.251,55.286 14.251,52.072 ; R21.2@18.569,47.602 R17.1 ; R17.1@18.696,50.256 17.416,51.537 14.786,51.537 14.251,52.072
NetQ1_1: Q1.1 R3.1 | length 1.9
  Top Layer w0.508: Q1.1 22.704,34.229 R3.1
NetQ2_1: Q2.1 R9.1 | length 2
  Top Layer w0.5: Q2.1 22.831,23.18 R9.1
Rx: H2.2 R12.1 U1.27 | length 30.1
  Top Layer w0.3: U1.27 55.626,51.181 57.277,52.832 H2.2
  Top Layer w0.508: H2.2 55.372,60.071 55.372,64.516 57.658,66.802 R12.1
SCL: H6.2 R7.1 U1.34 | length 23
  Top Layer w0.5: U1.34 52.832,68.961 57.404,73.533 H6.2 57.404,82.396 58.066,83.058 R7.1@58.447,83.058
SDA: H6.1 R8.1 U1.35 | length 23.4
  Top Layer w0.508: U1.35 51.816,71.501 54.737,74.422 54.737,84.455 55.753,85.471 R8.1@58.193,85.471
Tx: H2.3 R10.1 U1.26 | length 31.7
  Top Layer w0.3: U1.26 57.023,48.641 59.436,51.054 H2.3@59.436,58.166
  Top Layer w0.508: H2.3@59.436,58.166 57.023,60.579 57.023,63.881 57.912,64.77 R10.1
pads on no net: U1.1 U1.2 U1.3 U1.4 U1.5 U1.6 U1.15 U1.16 U1.17 U1.21 U1.22 U1.23 U1.24 U1.25 U1.28 U1.29 U1.30 U1.31 U1.32 U1.33 U1.36 U1.37 U1.38

## Polygon pours and split planes (outlines as drawn)
GND on Bottom Layer "Top Layer-No Net" (solid, remove dead copper, pour order 2): -0.635,93.472 -0.635,0.889 69.469,0.889 69.469,93.472
GND on Top Layer "Top Layer-No Net" (solid, remove dead copper, pour order 4): -0.635,93.472 -0.635,0 70.104,0 70.104,93.472

## Keep-outs
Top Layer:
  region: 38.1,24.765 45.593,24.765 45.847,24.511 45.847,17.272 45.212,16.637 38.481,16.637 37.973,17.145 37.973,24.638
Keep-Out Layer:
  lines w0.254: 0,0 1.778,0 70.104,0 70.104,92.583 0,92.583 0,0

## Other copper
Top Layer:
  region net +24V: 37.211,25.463 37.084,25.59 35.56,25.59 33.401,23.431 33.401,18.542 32.766,17.907 17.082,17.907 12.446,13.271 12.446,10.033 12.954,9.398 16.51,9.398 17.145,10.033 17.145,12.763 19.177,14.795 25.527,14.795 26.289,14.034 26.797,13.525 26.797,9.335 27.305,8.826 30.48,8.826 31.369,9.716 31.369,14.351 32.131,15.185 36.638,15.185 37.338,16.002 37.338,25.59 36.957,25.59
  region net GND: 35.565,29.337 35.565,28.326 35.56,28.321 35.687,28.194 36.449,28.194 36.576,28.321 36.576,29.332 36.571,29.337
  region net +3.3V: 61.849,74.295 61.849,75.057 61.468,75.438 61.468,80.899 59.431,82.936 59.431,85.725 60.833,85.725 60.833,83.566 63.119,81.28 63.119,77.216 62.992,77.089 62.865,76.962 62.865,74.295
  region net +3.3V: 61.341,57.277 61.595,57.023 63.754,57.023 63.754,59.309 63.627,59.436 63.246,59.436 62.865,59.817 62.865,60.325 62.865,67.564 61.341,67.564 61.341,60.452
  region net +3.3V: 50.927,17.653 50.927,29.337 49.911,30.353 46.228,30.353 46.228,17.272 46.609,16.891 47.371,16.891 47.625,16.637 47.625,12.7 46.863,11.938 41.91,11.938 41.275,11.303 41.275,7.493 41.402,7.493 42.037,6.858 50.292,6.858 50.8,7.366 50.8,7.493 50.927,7.62
  region net NetC12_1: 32.639,26.924 35.306,26.924 35.687,26.924 36.068,26.543 36.068,25.908 37.338,25.908 37.338,26.543 36.195,27.686 35.306,27.686 35.306,29.337 33.147,29.337 32.639,28.829
  region net +3.3V: 35.306,26.416 35.306,25.908 34.671,25.273 31.877,25.273 31.369,25.781 31.369,26.416
  region net NetC9_1: 38.1,30.607 38.1,27.686 38.735,27.051 39.624,27.051 39.878,26.797 39.878,26.035 39.624,25.781 38.1,25.781 38.1,26.67 36.83,27.94 36.83,30.607
  region net NetC9_2: 38.608,30.607 38.354,30.353 38.354,27.813 38.862,27.305 39.878,27.305 40.132,27.051 40.132,25.781 39.878,25.527 38.608,25.527 38.608,25.019 42.926,25.019 43.18,25.273 43.18,30.607
  region net GND: 38.1,24.511 45.466,24.511 45.466,17.272 45.085,16.891 38.608,16.891 38.1,17.399

## Silkscreen, mask and mechanical layers (free items; w line width, h text height)
Top Overlay:
  lines w0.254: 52.07,13.843 52.07,53.467 52.07,53.975 52.578,53.975 64.77,53.975 64.77,13.843 52.07,13.843
  text "BUTTON" at 13.335,84.328 h1.3 r270
  text "OLED" at 52.324,73.787 h1.3
  text "GND" at 13.462,72.771 h0.8 r270
  text "LIMIT" at 14.503,51.994 h1.3 r270
  text "LoadCell" at 53.594,51.943 h1.3
  text "+" at 13.437,38.837 h0.8 r270
  text "PULSE" at 15.062,36.678 h1.3 r270
  text "+" at 13.665,28.88 h0.8 r270
  text "DIR" at 15.062,25.476 h1.3 r270
  text "+24V_In" at 9.144,15.367 h1.3
  text "+24V_Out" at 22.86,15.367 h1.3
  text "+3V3_Out" at 37.465,15.367 h1.3
  text "+" at 32.004,14.605 h0.8 r270
  text "+" at 46.228,14.605 h0.8 r270
  text "+" at 17.78,14.478 h0.8 r270
Bottom Overlay:
  text "LAB_COATING_COF" at 62.992,44.069 h2.54 r90
Mechanical 20:
  drawing of 215 lines, arcs and shapes, not listed
  text "Layer" at -18.787,124.206 h1.52
  text "Name" at -8.376,124.206 h1.52
  text "Material" at 15.24,124.206 h1.52
  text "Thickness" at 37.078,124.206 h1.52
  text "Constant" at 53.584,124.206 h1.52
  text "Board Layer Stack" at 68.058,124.206 h1.52
  text "1" at -18.787,121.158 h1.52
  text "Top Overlay" at -8.376,121.158 h1.52
  text "2" at -18.787,118.11 h1.52
  text "Top Solder" at -8.376,118.11 h1.52
  text "Solder Resist" at 15.24,118.11 h1.52
  text "0.40mil" at 37.078,118.11 h1.52
  text "3.5" at 53.584,118.11 h1.52
  text "3" at -18.787,115.062 h1.52
  text "Top Layer" at -8.376,115.062 h1.52
  text "Copper" at 15.24,115.062 h1.52
  text "1.40mil" at 37.078,115.062 h1.52
  text "4" at -18.787,112.014 h1.52
  text "Dielectric 1" at -8.376,112.014 h1.52
  text "FR-4" at 15.24,112.014 h1.52
  text "10.00mil" at 37.078,112.014 h1.52
  text "4.2" at 53.584,112.014 h1.52
  text "5" at -18.787,108.966 h1.52
  text "Bottom Layer" at -8.376,108.966 h1.52
  text "Copper" at 15.24,108.966 h1.52
  text "1.40mil" at 37.078,108.966 h1.52
  text "6" at -18.787,105.918 h1.52
  text "Bottom Solder" at -8.376,105.918 h1.52
  text "Solder Resist" at 15.24,105.918 h1.52
  text "0.40mil" at 37.078,105.918 h1.52
  text "3.5" at 53.584,105.918 h1.52
  text "7" at -18.787,102.87 h1.52
  text "Bottom Overlay" at -8.376,102.87 h1.52
  text "70.104 (mm)" at 27.432,94.615 h1.52
  text "47.752 (mm)" at 74.144,45.464 h1.52 r270.15
  text "92.583 (mm)" at -3.302,38.481 h1.52 r90